# Altium PCB home.PcbDoc
Units mil, origin at the board's own origin, x right, y up, seen from the top; angles counter-clockwise.
Board outline 6000 x 4000 mil, 2 copper layers (Top Layer, Bottom Layer); 66 components, 50 nets, 192 pads, 25 vias.
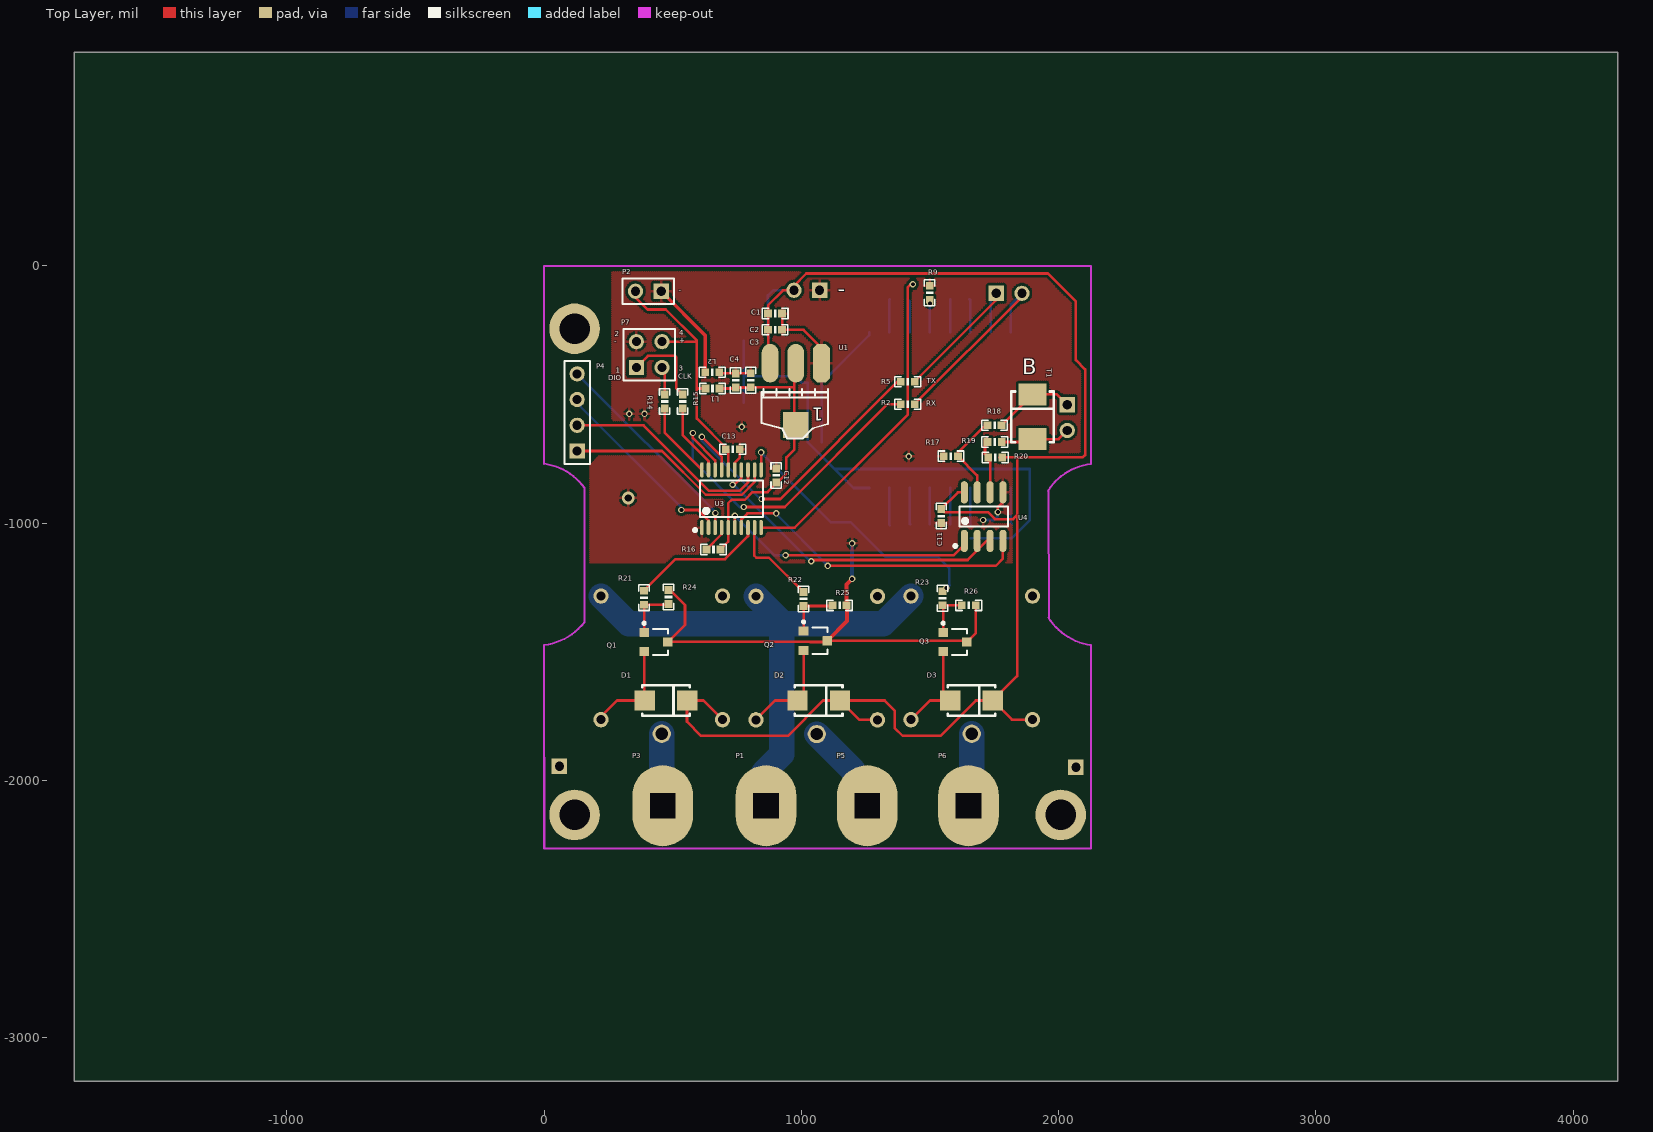
[diagram p0: Top Layer view]
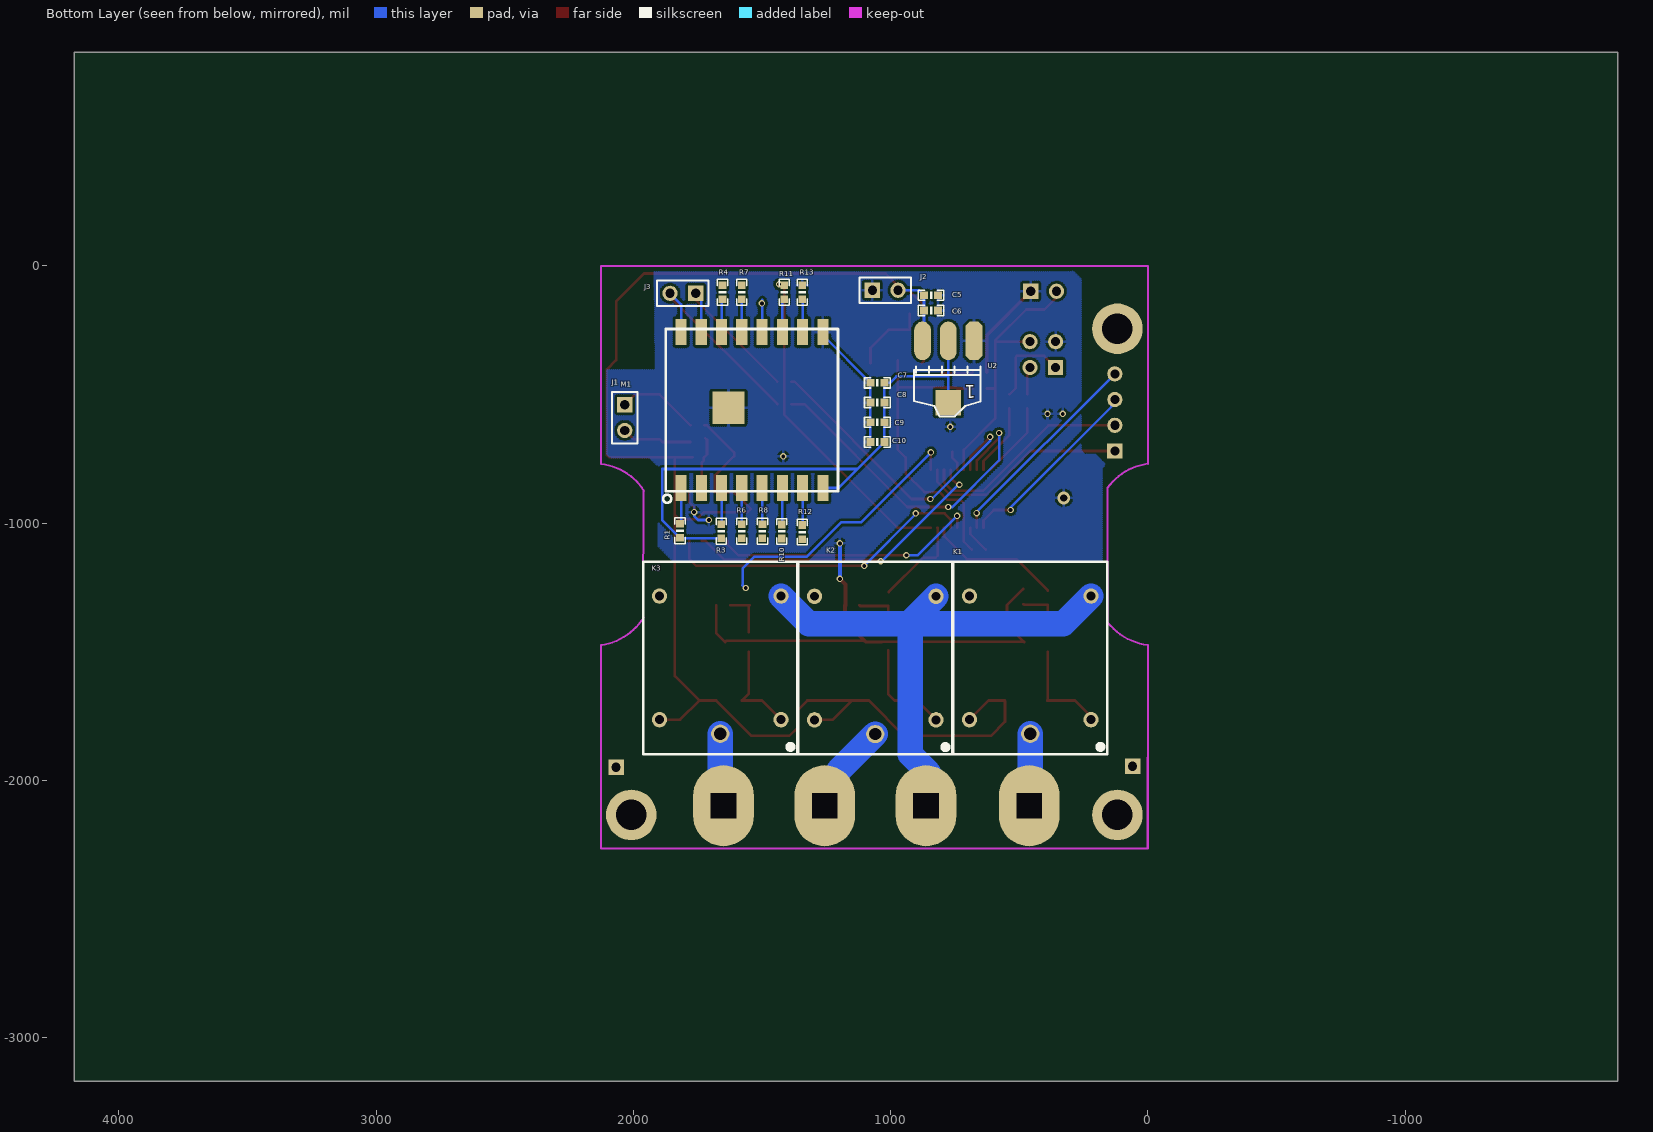
[diagram p1: Bottom Layer view, seen from below]

## Layer stack, top to bottom
Top Solder: solder mask 0.4, Solder Resist, Dk 3.5
Top Layer: signal copper 1.4
Dielectric 1: dielectric 12.6, FR-4, Dk 4.8
Bottom Layer: signal copper 1.4
Bottom Solder: solder mask 0.4, Solder Resist, Dk 3.5

## Board outline
-1826.85,-3169.37 4173.15,-3169.37 4173.15,830.63 -1826.85,830.63

## Design rules (kind name [scope] priority, off if disabled: settings)
Clearance [InNet('AVCC_GND')] p1: gap=10 ignorepadtopadclearanceinfootprint=FALSE
Clearance Clearance_1 [All] p2: gap=1 ignorepadtopadclearanceinfootprint=FALSE
HoleSize [All] p1: absolutevalues=TRUE maxlimit=350 minlimit=1 maxpercent=80.000 minpercent=20.000
MinimumSolderMaskSliver [All] p1: minsoldermaskwidth=3
PolygonConnect [All] p1: connectstyle=Relief reliefconductorwidth=10 reliefentries=4 polygonreliefangle="90 Angle" airgapwidth=10
RoutingVias [All] p1: holewidth=28 width=50 viastyle="Through Hole" minholewidth=28 minwidth=50 maxholewidth=28 maxwidth=50
SilkToSilkClearance [All] p1: silktosilkclearance=0
SilkToSolderMaskClearance [IsPad] p1: minsilkscreentomaskgap=0 clearancetoexposedcopper=TRUE
SolderMaskExpansion [All] p1: expansion=4
Width [All] p1: maxlimit=100 minlimit=9 preferedwidth=10
26 further rules are at their usual default settings.

## Components (designator, comment, footprint, x,y, rotation, side; value= is the part's Value field where it differs from the comment)
C1 "0.1uf" 0603P 897.64,-185.04 r180 top
C2 "1uf" 0603P 897.58,-248.1 r180 top
C3 "220uf" 0603P 803.15,-444.32 r270 top
C4 "0.1uf" 0603P 744.09,-444.88 r270 top
C5 "0.1uf" 0603P 842.52,-114.17 r0 bottom
C6 "1uf" 0603P 842.52,-173.23 r0 bottom
C7 "220uf" 0603P 1051.15,-454.37 r180 bottom
C8 "0.1uf" 0603P 1051.15,-531.04 r180 bottom
C9 "10uf" 0603P 1051.15,-607.7 r180 bottom value=10uF
C10 "100nf" 0603P 1051.15,-684.37 r180 bottom value=100nF
C11 "0.1uf" 0603P 1543.15,-972.37 r90 top
C12 "0.1uf" 0603P 901.57,-814.4 r270 top value=0.1uF
C13 "0.1uf" 0603P 732.84,-712.6 r180 top value=0.1uF
D1 "D1N4007" LC-SMA(DO-214AC)_S1 473.15,-1689.37 r180 top
D2 "D1N4007" LC-SMA(DO-214AC)_S1 1066.99,-1689.37 r180 top
D3 "D1N4007" LC-SMA(DO-214AC)_S1 1660.83,-1689.37 r180 top
J1 "CON2" HDR1X2 2033.15,-539.37 r270 bottom
J2 "CON2" HDR1X2 1070.87,-94.49 r180 bottom
J3 "CON2" HDR1X2 1757.15,-106.3 r0 bottom
K1 "Relay" JQC-3FF 693.15,-1149.37 r90 bottom
K2 "Relay" JQC-3FF 1295.59,-1150.51 r90 bottom
K3 "Relay" JQC-3FF 1898.15,-1149.37 r90 bottom
L1 "Inductor" 0603P 654.1,-476.38 r180 top value=60Ω
L2 "Inductor" 0603P 653.54,-413.39 r180 top value=60Ω
M1 "ESP-07S Module" "ESP-07S Module" 1508.27,-560.04 r90 bottom
P1 "tongzhu" TONGZHU 862.2,-2098.43 r180 top
P2 "Header 2" HDR1X2 454.72,-98.43 r180 top
P3 "tongzhu" TONGZHU 460.63,-2098.43 r0 top
P4 "Header 4" HDR1X4 128.15,-719.37 r90 top
P5 "tongzhu" TONGZHU 1255.91,-2098.43 r0 top
P6 "tongzhu" TONGZHU 1649.61,-2098.43 r0 top
P7 "Header 2X2" HDR2X2 358.15,-394.37 r0 top
Q1 "NPN" SOT-23R 429.41,-1461.97 r270 top
Q2 "NPN" SOT-23R 1049.41,-1456.97 r270 top
Q3 "NPN" SOT-23R 1591.89,-1461.97 r270 top
R1 "100K" 0603P 1818.15,-1029.37 r270 bottom
R2 "0" 0603p 1413,-537.37 r180 top
R3 "100K" 0603P 1658.15,-1031.37 r270 bottom
R4 "0" 0603P 1653.15,-101.87 r270 bottom
R5 "0" 0603p 1413.39,-450 r180 top
R6 "0" 0603P 1578.15,-1031.37 r270 bottom
R7 "0" 0603P 1578.15,-101.87 r270 bottom
R8 "0" 0603P 1498.15,-1031.37 r270 bottom
R9 "100K" 0603P 1498.28,-104.37 r270 top
R10 "0" 0603P 1423.09,-1031.87 r270 bottom
R11 "0" 0603P 1413.09,-101.87 r270 bottom
R12 "0" 0603P 1343.15,-1034.37 r270 bottom
R13 "100K" 0603P 1343.09,-101.87 r270 bottom
R14 "0" 0603P 468.09,-526.87 r90 top
R15 "0" 0603P 538.09,-526.87 r90 top
R16 "100K" 0603p 658.04,-1102.36 r180 top
R17 "20K" 0603P 1581.15,-739.37 r180 top
R18 "10R" 0603P 1750.65,-619.43 r180 top
R19 "10R" 0603P 1751.15,-684.37 r180 top
R20 "20K" 0603P 1753.15,-744.37 r180 top
R21 "2K" 0603P 388.15,-1289.37 r270 top
R22 "2K" 0603P 1008.15,-1294.37 r270 top
R23 "2K" 0603P 1548.21,-1291.87 r270 top
R24 "4.7K" 0603P 483.21,-1286.87 r270 top
R25 "4.7K" 0603P 1148.15,-1319.37 r180 top
R26 "4.7K" 0603P 1650.65,-1319.43 r180 top
T1 "SMBJ6.5CA" LC-SMB(DO-214AA)_S1 1898.15,-586.38 r270 top
U1 "AMS1117-3.3" AMS1117 1077.98,-378.02 r180 top
U2 "AMS1117-3.3" AMS1117 675.56,-291.4 r0 bottom
U3 "STM32L011F4P6" LC-TSSOP-20 728.21,-904.87 r0 top
U4 "ADM483EAR" LC-SOIC-8_150mil 1708.15,-974.37 r0 top

## Footprints (in the part's own frame and the unit in brackets; to place one, negate y for a bottom-side part, rotate by r counter-clockwise, add the part's x,y. Pads: shape width x height; smd on the part's side, far side on the other; paste and mask are expansions set on the pad)
0603P [mil]
  rect 30x30 smd: 1(-27,0) 2(27.5,-0.06)
  silkscreen extent -50,-20 50,20
0603p [mil]
  rect 30x30 smd: 1(-27,0) 2(27.5,-0.06)
  silkscreen extent -50,-20 50,20
AMS1117 [mil]
  oct 65x150 smd: 1(0.03,-0.06)
  oval 65x150 smd: 2(100.03,-0.06) 3(200.03,-0.06)
  rect 100x100 smd: 4(100.03,239.94)
  silkscreen extent -26,100 234,293
"ESP-07S Module" [mm]
  rect 3.2x3.2 smd: 0(0.22,3.092)
  rect 2.6x1.1 smd: 1(-7.7,7.775) 2(-7.7,5.762) 3(-7.7,3.775) 4(-7.7,1.775) 5(-7.7,-0.225) 6(-7.7,-2.225) 7(-7.7,-4.225) 8(-7.7,-6.225) 9(7.7,-6.225) 10(7.7,-4.225) 11(7.7,-2.225) 12(7.7,-0.225) 13(7.7,1.775) 14(7.7,3.775) 15(7.7,5.775) 16(7.7,7.769)
  silkscreen extent -9.16,-7.73 8,9.55
HDR1X2 [mm] "Connector; Header; 2 Position"
  rect 1.5x1.5 hole 0.9: 1(0,0)
  round 1.5 hole 0.9: 2(2.54,0)
  silkscreen extent -1.27,-1.27 3.81,1.27
HDR1X4 [mm] "Connector; Header; 4 Position"
  rect 1.5x1.5 hole 0.9: 1(0,0)
  round 1.5 hole 0.9: 2(2.54,0) 3(5.08,0) 4(7.62,0)
  silkscreen extent -1.27,-1.27 8.89,1.27
HDR2X2 [mm] "Connector; Header; 2x2 Position"
  rect 1.5x1.5 hole 0.9: 1(0,0)
  round 1.5 hole 0.9: 2(0,2.54) 3(2.54,0) 4(2.54,2.54)
  silkscreen extent -1.27,-1.27 3.81,3.81
JQC-3FF [mm] "继电器"
  round 1.524 hole 0.862: 1(-15.6,-12) 2(-3.4,-12) 3(-3.4,0) 4(-15.6,0)
  round 1.8 hole 1.2: 5(-17,-6)
  silkscreen extent -19,-13.6 0,1.6
LC-SMA(DO-214AC)_S1 [mm]
  rect 2x2 smd: 1(2.1,0) 2(-2.1,0)
  silkscreen extent -2.35,-1.5 2.35,1.5
LC-SMB(DO-214AA)_S1 [mil]
  rect 85x107.99 smd: 1(87.01,0) 2(-87.01,0)
  silkscreen extent -98,-83 98,83
LC-SOIC-8_150mil [mm]
  oval 0.7x2.2 smd: 1(-1.905,-2.4) 2(-0.635,-2.4) 3(0.635,-2.4) 4(1.905,-2.4) 5(1.905,2.4) 6(0.635,2.4) 7(-0.635,2.4) 8(-1.905,2.4)
  silkscreen extent -2.95,-3.05 2.4,1
LC-TSSOP-20 [mm]
  oval 0.35x1.5 smd: 1(-2.925,-2.85) 2(-2.275,-2.85) 3(-1.625,-2.85) 4(-0.975,-2.85) 5(-0.325,-2.85) 6(0.325,-2.85) 7(0.975,-2.85) 8(1.625,-2.85) 9(2.275,-2.85) 10(2.925,-2.85) 11(2.925,2.85) 12(2.275,2.85) 13(1.625,2.85) 14(0.975,2.85) 15(0.325,2.85) 16(-0.325,2.85) 17(-0.975,2.85) 18(-1.625,2.85) 19(-2.275,2.85) 20(-2.925,2.85)
  silkscreen extent -3.75,-3.25 3.1,1.8
SOT-23R [mm]
  rect 0.9x0.95 smd: 1(0.95,-1.048) 2(-0.95,-1.048) 3(0,1.302)
  silkscreen extent -1.98,-1.17 1.3,1.3
TONGZHU [mm] "铜柱焊盘"
  oval 6x8 hole 2.5 square: 1(0,0)

## Part data
C1 C2 C3 C4 C5 C6 C7 C8: library part Cap, "Capacitor", LatestRevisionDate=17-Jul-2002, LatestRevisionNote="Re-released for DXP Platform.", PackageDescription="Radial Cap, Thru-Hole; 2 Leads; 0.3 in Pin Spacing", PackageReference=RAD-0.3, Published=8-Jun-2000, Publisher="Altium Limited"
C9 C10 C12 C13: library part C
C11: library part CAP, Part Field 1="多层片式陶瓷电容  Y5V 50V 0.1μF±20%   CL21F104MBNE", Part Field 2=三星公司/风华公司, Part Field 3=0.008
D1 D2 D3: library part "Diode 1N4007", "1 Amp General Purpose Rectifier", Code_JEDEC=DO-204-AL, ComponentLink1Description="Manufacturer Link", ComponentLink1URL=http://www.fairchildsemi.com/, ComponentLink2Description=Datasheet, ComponentLink2URL=http://www.fairchildsemi.com/ds/1N%2F1N4001.pdf, DatasheetVersion=1998, LatestRevisionDate=17-Jul-2002, LatestRevisionNote="Re-released for DXP Platform.", PackageDescription="Diode, Axial; Body 5.2 x 2.7 mm (LxDia. max), Lead Dia. 0.86 mm (max)", PackageReference=DO-41, PackageVersion=Aug-1999, Published=8-Jun-2000, Publisher="Altium Limited"
J1 J2 J3: "Connector"
K1 K2 K3: library part JQC-3FF, "继电器05-1ZS(551)"
P1 P3 P5 P6: "铜柱"
P2: "Header, 2-Pin", LatestRevisionDate=17-Jul-2002, LatestRevisionNote="Re-released for DXP Platform.", Publisher="Altium Limited"
P4: "Header, 4-Pin", LatestRevisionDate=17-Jul-2002, LatestRevisionNote="Re-released for DXP Platform.", Publisher="Altium Limited"
P7: "Header, 2-Pin, Dual row", LatestRevisionDate=17-Jul-2002, LatestRevisionNote="Re-released for DXP Platform.", Publisher="Altium Limited"
Q1 Q2 Q3: "8050", Code_JEDEC=TO-226-AA, LatestRevisionDate=17-Jul-2002, LatestRevisionNote="Re-released for DXP Platform.", PackageDescription="TO, Flat Index; 3 In-Line, Axial Leads; Body Dia. 4.8mm; Leads 0.55 x 0.51 mm (max)", PackageReference=TO-226-AA, Published=8-Jun-2000, Publisher="Altium Limited"
R1 R2 R3 R4 R5 R6 R7 R8 R9 R10 R11 R12 R13 R14 R15 R16 R21 R22 R23 R24 R25 R26: library part Res1, "Resistor", LatestRevisionDate=17-Jul-2002, LatestRevisionNote="Re-released for DXP Platform.", PackageDescription="Axial Device, Thru-Hole; 2 Leads; 0.3 in Pin Spacing", PackageReference=AXIAL-0.3, Published=8-Jun-2000, Publisher="Altium Limited"
R17 R20: library part RES, Part Field 1="0603片式电阻   1KΩ±5%", Part Field 2=三星公司/风华公司, Part Field 3=0.004
R18 R19: library part RES2
T1: library part TVS, "快速瞬变二极管"
U1 U2: library part AMS1117
U4: library part SN75LBC184, Part Field 1=485оƬ, Part Field 2=文晔集团, Part Field 3=1.5, Part Field 4=13810449530, Part Field 5=孟冬
L1 L2: Code_IEC=1005, Code_JEITA=0402, LatestRevisionDate=29-May-2009, LatestRevisionNote="IPC-7351 Footprint Added.", PackageDescription="Chip Inductor", PackageReference=0402-A, Published=8-Jun-2000, Publisher="Altium Limited"

## Free pads (board coordinates)
  rect 60x60 hole 35.43: 2(59.06,-1944.88) 2(2066.93,-1948.82)
  round 196.85 hole 118.11 unplated: ""(118.11,-2133.86) ""(118.11,-244.09) ""(2007.87,-2133.86)

## Via types
v1: diameter 25, hole 15, Top Layer to Bottom Layer, 24 vias
v2: diameter 50, hole 28, Top Layer to Bottom Layer, 1 vias

## Nets (pads, with @x,y where several pads share a name; then routed paths per layer and width w, separated by ;. In a path a pad name is that pad's centre, name@x,y a point inside that pad or via, vN(x,y) a via of type N, cw(c..) or ccw(c..) an arc to the next point about the centre after c; other vN are vias at no path point)
485A: J1.2 R19.1 T1.1 | length 273.6
  Top Layer w10: R19.1 1887.17,-684.37 T1.1 1999.13,-673.39 J1.2
485B: J1.1 R18.1 T1.2 | length 321.8
  Top Layer w10: R18.1 1778.09,-619.43 T1.2 1993.15,-499.37 J1.1
AC1_OUT: K1.5 P3.1 | length 176.2
  Bottom Layer w98.43: K1.5 456.93,-1983.15 P3.1@465.21,-1991.43
AC2_OUT: K2.5 P5.1 | length 397.6
  Bottom Layer w10: P5.1@1201.9,-1962.33 1193.15,-1971.09 1193.15,-1999.37 1238.94,-1999.37 1254.96,-2015.39 P5.1@1254.96,-2102.36
  Bottom Layer w98.43: K2.5 P5.1@1201.9,-1962.33
AC3_OUT: K3.5 P6.1 | length 289.2
  Bottom Layer w10: P6.1@1648.66,-2102.36 P6.1@1661.93,-2089.09
  Bottom Layer w98.43: P6.1@1661.93,-2089.09 K3.5
AC_IN: K1.2 K2.2 K3.2 P1.1 | length 2185.8
  Bottom Layer w10: P1.1@853.15,-1969.37 853.15,-2094.25 P1.1@861.26,-2102.36
  Bottom Layer w98.43: K1.2 328.15,-1390.67 923.15,-1390.67 ; K2.2 923.15,-1384.37 923.15,-1390.67 ; P1.1@853.15,-1969.37 923.15,-1899.37 923.15,-1390.67 ; K3.2 1318.27,-1390.67 923.15,-1390.67
AVCC: C13.2 L1.2 P2.2 P7.4 U3.16 | length 1054
  Top Layer w10: P2.2 354.72,-122.44 401.57,-169.29 472.44,-169.29 593.15,-290 593.15,-294.37 ; P7.4 593.15,-294.37 ; L1.2 593.21,-476.31 593.15,-476.38 ; U3.16 715.42,-715.42 593.15,-593.15 593.15,-476.38 ; 593.15,-476.38 593.15,-294.37
  Bottom Layer w10: P2.2@354.33,-98.43 P2.2
AVCC_GND: C1.1 C2.1 C3.1 C4.1 C5.1 C6.1 C7.1 C8.1 C9.1 C10.1 C11.1 C12.1 C13.1 J2.1 L2.1 L2.2 M1.0 M1.9 P2.1 P7.2 Q1.3 Q2.3 Q3.3 R9.1 R13.1 R17.2 R24.1 R25.1 R26.1 U1.1 U2.1 U3.1 U3.15 U4.5 | length 3577.9
  Top Layer w10: Q1.3 480.67,-1461.65 Q1.3@480.98,-1461.65 ; R24.1@484.25,-1255.91 547.24,-1318.9 547.24,-1395.39 Q1.3@480.98,-1461.65 ; L2.1 685.04,-417.88 C4.1 744.65,-417.32 C3.1 ; U3.15 741.01,-764.66 760.65,-745.02 C13.1@760.65,-721.87 ; C1.1@924.58,-185.1 C2.1 1007.94,-248.1 1077.95,-318.11 U1.1 ; R26.1@1677.17,-1318.9 1677.17,-1427.95 Q3.3 1638.15,-1456.97 1575.86,-1456.97 1575.54,-1457.28 1100.67,-1457.28 Q2.3 1095.67,-1461.97 1033.38,-1461.97 1033.06,-1461.65 Q1.3@480.98,-1461.65 ; v1(1763.78,-956.69) 1763.78,-937.01 1783.15,-917.64 U4.5
  Top Layer w15: P2.1 626.04,-269.74 L2.2 ; Q2.3 1177.17,-1380.47 R25.1@1177.17,-1318.9 ; R25.1 1175.15,-1238.24 v1(1196.85,-1216.54)
  Bottom Layer w10: C10.1 C9.1 C8.1 C7.1 1263.19,-269.33 M1.9 ; v1@1196.85,-1086.61 v1(1196.85,-1078.74) ; v1(1706.07,-987.68) 1748.54,-987.68 1763.78,-972.44 1763.78,-964.57 1771.65,-956.69 v1(1763.78,-956.69)
  Bottom Layer w15: v1(1196.85,-1216.54) v1@1196.85,-1086.61
  other v1: 1417.32,-740.16 767.72,-625.37 330.71,-574.8 389.76,-574.8
  other v2: 326.77,-901.57
CLK: R11.1 U3.10 | length 1263.7
  Top Layer w10: U3.10 973.93,-1017.07 1413.39,-577.61 1413.39,-82.68 v1@1425.2,-70.87
  other v1: 1433.07,-70.87
DO1: R21.1 U3.8 | length 525.1
  Top Layer w10: R21.1 511.15,-1139.37 703.15,-1139.37 792.19,-1050.33 U3.8
DO2: R22.1 U3.9 | length 360
  Top Layer w10: U3.9 815.65,-1019.21 815.65,-1125.52 824.44,-1134.31 873.09,-1134.31 R22.1@1007.15,-1268.37
DO3: R23.1 U3.11 | length 1070.2
  Top Layer w10: U3.11 v1(843.37,-724.71)
  Bottom Layer w10: v1(843.37,-724.71) 1115.66,-997 1192,-997 1324.92,-1129.92 1529.46,-1129.92 1574.8,-1175.26 1574.8,-1240.16 1576.08,-1241.44 1565.55,-1251.97 v1(1562.99,-1251.97)
IN01: P4.1 U3.12 | length 827.7
  Top Layer w10: P4.1 457.88,-719.37 627.88,-889.37 768.11,-889.37 817.78,-839.7 U3.12
IN02: P4.2 U3.13 | length 831.9
  Top Layer w10: P4.2 386.17,-619.37 640.81,-874.02 759.84,-874.02 792.19,-841.67 U3.13
IN03: P4.3 U3.2 | length 747.4
  Top Layer w10: v1(533.15,-948.82) 598.39,-948.82 638.65,-989.07 U3.2
  Bottom Layer w10: P4.3 141.73,-532.95 141.73,-547.24 533.15,-938.66 v1(533.15,-948.82)
IN04: P4.4 U3.3 | length 820.7
  Top Layer w10: U3.3 664.24,-961.75 v1(665.35,-960.63)
  Bottom Layer w10: P4.4 665.35,-956.57 v1(665.35,-960.63)
LOAD_RX: J3.2 M1.16 R2.1 | length 772.3
  Top Layer w10: R2.1 1857.15,-120.22 J3.2
  Bottom Layer w10: M1.16 1814.13,-149.32 J3.2
LOAD_TX: J3.1 M1.15 R5.1 | length 634.4
  Top Layer w10: R5.1 1757.15,-133.24 J3.1
  Bottom Layer w10: M1.15 1735.63,-127.82 J3.1
LPUART1_RX: U3.6 U4.1 | length 1032.5
  Top Layer w10: U3.6 v1(741.01,-971.51) ; v1(938.15,-1124.37) 1592.17,-1124.37 1633.15,-1083.39 U4.1
  Bottom Layer w10: v1(741.01,-971.51) 893.87,-1124.37 v1(938.15,-1124.37)
LPUART1_TX: U3.7 U4.4 | length 1222.6
  Top Layer w10: U3.7 766.6,-985.37 789.97,-962 v1(902,-962) ; v1(1102,-1166) 1755.26,-1166 1783.15,-1138.11 U4.4
  Bottom Layer w10: v1@902.01,-965 1102,-1164.99 v1(1102,-1166)
NetD1_1: D1.1 K1.1 Q1.1 | length 392.5
  Top Layer w10: K1.1@216.54,-1755.91 283.07,-1689.37 D1.1 388.15,-1687.05 Q1.1
NetD2_1: D2.1 K2.1 Q2.1 | length 397.2
  Top Layer w10: K2.1@822.83,-1763.78 897.24,-1689.37 D2.1 1008.15,-1665.53 Q2.1
NetD3_1: D3.1 K3.1 Q3.1 | length 385.2
  Top Layer w10: K3.1@1425.2,-1763.78 1499.61,-1689.37 D3.1 1550.63,-1661.85 Q3.1
NetM1_1: M1.1 R1.1 | length 140.7
  Bottom Layer w10: M1.1 1814.37,-998.59 R1.1
NetM1_3: M1.3 R3.1 | length 141.7
  Bottom Layer w10: M1.3 1656.89,-1003.11 R3.1
NetM1_4: M1.4 R6.1 | length 141.2
  Bottom Layer w10: R6.1 M1.4
NetM1_5: M1.5 R8.1 | length 141.7
  Bottom Layer w10: R8.1 1499.41,-1003.11 M1.5
NetM1_6: M1.6 R10.1 | length 142.7
  Bottom Layer w10: M1.6 1420.67,-1002.45 R10.1
NetM1_7: M1.7 R12.1 | length 144.7
  Bottom Layer w10: M1.7 1341.93,-1006.15 R12.1
NetM1_10: M1.10 R13.2 | length 128
  Bottom Layer w10: M1.10 1341.93,-130.59 R13.2
NetM1_11: M1.11 R11.2 | length 130.6
  Bottom Layer w10: R11.2 1420.67,-136.89 M1.11
NetM1_12: M1.12 R9.2 | length 125.5
  Bottom Layer w10: 1498.21,-131.87 1499.41,-133.07 M1.12
  other v1: 1500,-145.67
NetM1_13: M1.13 R7.2 | length 127.5
  Bottom Layer w10: M1.13 1578.15,-129.43 R7.2
NetM1_14: M1.14 R4.2 | length 129
  Bottom Layer w10: R4.2 1656.89,-133.05 M1.14
NetQ1_2: Q1.2 R21.2 R24.2 | length 203.8
  Top Layer w10: Q1.2 388.15,-1316.93 R21.2 480.65,-1316.87 R24.2
NetQ2_2: Q2.2 R22.2 R25.2 | length 211.3
  Top Layer w10: Q2.2 1008.15,-1321.93 R22.2 1118.09,-1321.87 R25.2
NetQ3_2: Q3.2 R23.2 R26.2 | length 181.2
  Top Layer w10: Q3.2 1550.63,-1321.85 R23.2 R26.2
NetR14_1: R14.1 U3.20 | length 298.8
  Top Layer w10: R14.1 468.09,-647.69 U3.20
NetR15_1: R15.1 U3.19 | length 280.4
  Top Layer w10: R15.1 538.09,-657.59 638.65,-758.15 U3.19
NetR16_2: R16.2 U3.4 | length 109.8
  Top Layer w10: R16.2 689.83,-1043.01 U3.4
NetR17_1: R17.1 R18.2 U4.7 | length 345.1
  Top Layer w10: U4.7 1683.15,-814.37 R17.1 1608.15,-724.37 1713.15,-619.37 R18.2
NetR19_2: R19.2 R20.2 U4.6 | length 221.6
  Top Layer w10: 1720.65,-669.31 1713.65,-676.31 1713.65,-732.31 R20.2 1725.65,-756.31 1733.15,-763.81 U4.6
R/D: U3.14 U4.2 U4.3 | length 1238.9
  Top Layer w10: v1(732.28,-850.39) 740.16,-850.39 766.6,-823.95 U3.14 ; v1@1037,-1149.37 1043.37,-1143 1646,-1143 1720.14,-1068.86 U4.3
  Bottom Layer w10: v1(732.28,-850.39) 736.22,-850.39 1037,-1151.17 1038,-1150.17 v1(1038,-1148)
SWDCLK: P7.3 R14.2 | length 109.1
  Top Layer w10: P7.3 468.15,-404.37 R14.2
SWDIO: P7.1 R15.2 | length 330.7
  Top Layer w10: P7.1 402.68,-349.84 508.62,-349.84 513.15,-354.37 513.15,-474.37 R15.2
USART2_RX: R2.2 U3.18 | length 1333.1
  Top Layer w10: v1(578.15,-649.37) 578.15,-669.37 664.24,-755.46 U3.18 ; v1(775.59,-937.01) 934.99,-937.01 1334.69,-537.31 R2.2
  Bottom Layer w10: v1(578.15,-649.37) 578.15,-755.32 759.84,-937.01 v1(775.59,-937.01)
USART2_TX: R5.2 U3.17 | length 1239.2
  Top Layer w10: v1(613.15,-664.37) 689.83,-741.05 U3.17 ; v1(844.9,-905.99) 918.01,-905.99 1374.06,-449.94 R5.2
  Bottom Layer w10: v1(613.15,-664.37) 613.15,-680.08 841.98,-908.91 844.9,-911.83 v1(844.9,-905.99)
VCC: C3.2 C4.2 C12.2 L1.1 R16.1 U1.2 U1.4 U3.5 | length 1214.7
  Top Layer w10: L1.1 740.03,-476.38 C4.2 802.53,-472.38 C3.2 967.89,-471.82 972.44,-476.38 ; R16.1 715.42,-1071.98 U3.5 715.42,-922.38 728.35,-909.45 779.53,-909.45 809.61,-879.37 868.15,-879.37 940.94,-806.57 940.94,-744.09 972.44,-712.6 972.44,-476.38 ; U1.2@972.44,-366.14 972.44,-476.38
VCC_5V: C1.2 C2.2 C5.2 C6.2 C11.2 D1.2 D2.2 D3.2 J2.2 K1.4 K2.4 K3.4 R20.1 U1.3 U2.3 U4.8 | length 6208.6
  Top Layer w10: D1.2@555.12,-1692.91 555.12,-1771.65 610.24,-1826.77 946.86,-1826.77 1084.26,-1689.37 D2.2 ; D1.2 618.5,-1689.37 K1.4@692.91,-1763.78 ; U1.3 870.08,-370.08 C2.2 870.08,-152.74 928.33,-94.49 J2.2 970.87,-77.09 1018.58,-29.37 1958.5,-29.37 2066.93,-137.8 2066.93,-365.83 2103.15,-402.05 2103.15,-599.37 2102.68,-599.84 2102.68,-734.84 2093.15,-744.37 1838.15,-744.37 ; K2.4 1224.98,-1764.68 D2.2 ; 1322.83,-1688.98 1323.23,-1689.37 ; U4.8 1608.2,-879.88 C11.2 1555.21,-956.87 1725.07,-956.87 1752.39,-984.19 1822.46,-984.19 1838.15,-968.5 ; R20.1@1768.15,-744.37 R20.1 1838.15,-744.37 ; K3.4 1817.68,-1763.54 D3.2 ; D2.2 1323.23,-1689.37 ; 1323.23,-1689.37 1362.2,-1728.35 1362.2,-1795.28 1393.7,-1826.77 1540.7,-1826.77 1678.1,-1689.37 D3.2 ; D3.2 1838.15,-1594.72 1838.15,-968.5 ; 1838.15,-968.5 1838.15,-744.37
  Bottom Layer w10: U2.3@875.59,-279.53 870.02,-273.96 C6.2 C5.2 889.64,-94.49 J2.2
WIFI_VCC: C7.2 C8.2 C9.2 C10.2 M1.8 R1.2 R3.2 U2.2 U2.4 | length 2259
  Bottom Layer w10: U2.4 775.59,-429.13 ; U2.2 775.59,-429.13 ; M1.8 1202.4,-863.19 1128.59,-789.37 ; R3.2 1816.21,-1058.87 R1.2 1888.15,-986.93 1888.15,-789.37 1128.59,-789.37 ; 775.59,-429.13 976.98,-429.13 1002.28,-454.43 C7.2 C8.2 C9.2 C10.2 1128.59,-789.37
pads on no net: K1.3 K2.3 K3.3 M1.2 R4.1 R6.2 R7.1 R8.2 R10.2 R12.2

## Polygon pours and split planes (outlines as drawn)
AVCC_GND on Top Layer "Top Layer-No Net" (hatched 90Degree grid 0 track 8, remove dead copper, pour order 0): 263.78,-23.62 1984.44,-23.62 2053,-126.5 2071,-373 2106.3,-393.7 2106.3,-748.03 2098.43,-755.91 1948.82,-755.91 1909.45,-795.28 1909.45,-1169.29 1905.51,-1173.23 1885.83,-1153.54 177.17,-1153.54 177.17,-818.9 177.17,-775.59 216.54,-736.22 263.78,-736.22
AVCC_GND on Bottom Layer "Top Layer-No Net" (hatched 90Degree grid 0 track 8, remove dead copper, pour order 2): 1917.78,-23.62 295.28,-23.62 291.34,-19.69 259.84,-51.18 259.84,-716.54 248.03,-732.28 204.72,-732.28 165.35,-771.65 177.17,-783.46 177.17,-1149.61 1842.52,-1149.61 1901.57,-1090.55 1901.58,-779.53 1937.01,-744.09 2090.55,-744.09 2102.36,-732.28 2102.36,-405.51 1913.39,-405.51

## Keep-outs
Keep-Out Layer:
  lines w7.87: -0.18,-1602.7 -0.18,-1473.63 ccw(c-27.57,-1243.09) 155.34,-1386.08 ; -0.15,-768.82 cw(c-31.73,-1000.02) 156.41,-861.98 156.16,-1386.08 ; 0,-1553.39 0.12,-2264.02 2125.98,-2264.02 2125.98,-1555.35 ; 0,-769.92 0,0 2125.98,0 2125.98,-769.92 ; 1957.97,-874.66 cw(c2153.55,-999.75) 2126.16,-769.2 ; 1959.55,-874.65 1963.09,-1366.39 ; 1959.81,-1366.45 ccw(c2157.71,-1242.82) 2126.13,-1474.02 ; 2122.41,-1473.63 2125.98,-1477.2 2125.98,-1579.37

## Silkscreen, mask and mechanical layers (free items; w line width, h text height)
Top Overlay:
  text "-" at 522,-105 h20
  text "-" at 1141.73,-118.11 h60
  text "+" at 525,-299 h20
  text "-" at 272,-303 h20
  text "B" at 1859,-421 h60
  text "CLK" at 521,-438 h20
  text "DIO" at 248,-444 h20
  text "TX" at 1487,-456 h20
  text "RX" at 1486,-543 h20

## Text inside footprints (layer, text, board x,y; h text height)
P7: Top Overlay "3" at 522,-408 h20; Top Overlay "4" at 525,-270 h20; Top Overlay "2" at 274,-273 h20; Top Overlay "1" at 278.15,-414.37 h20
U1: Top Overlay "1" at 1083.95,-550.95 h50 r180
U2: Bottom Overlay "1" at 669.59,-464.34 h50 r180